# EAGLE board tmod-base (EAGLE 7.7.0)
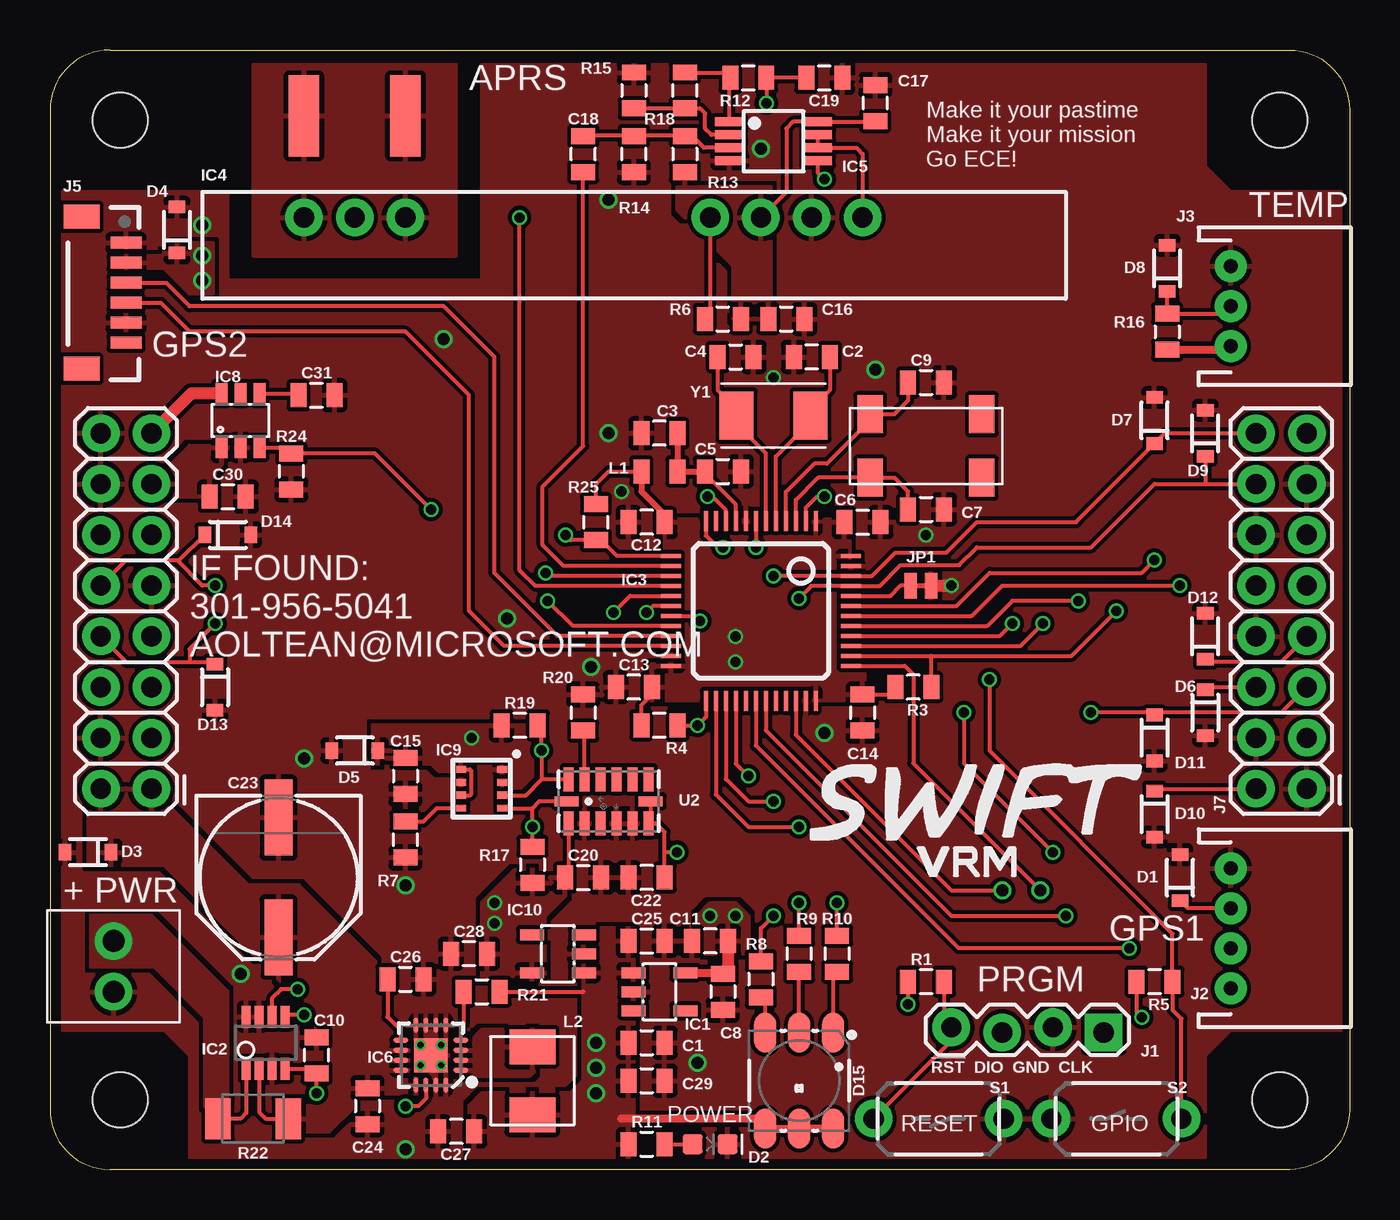
[diagram p0: board, top side]
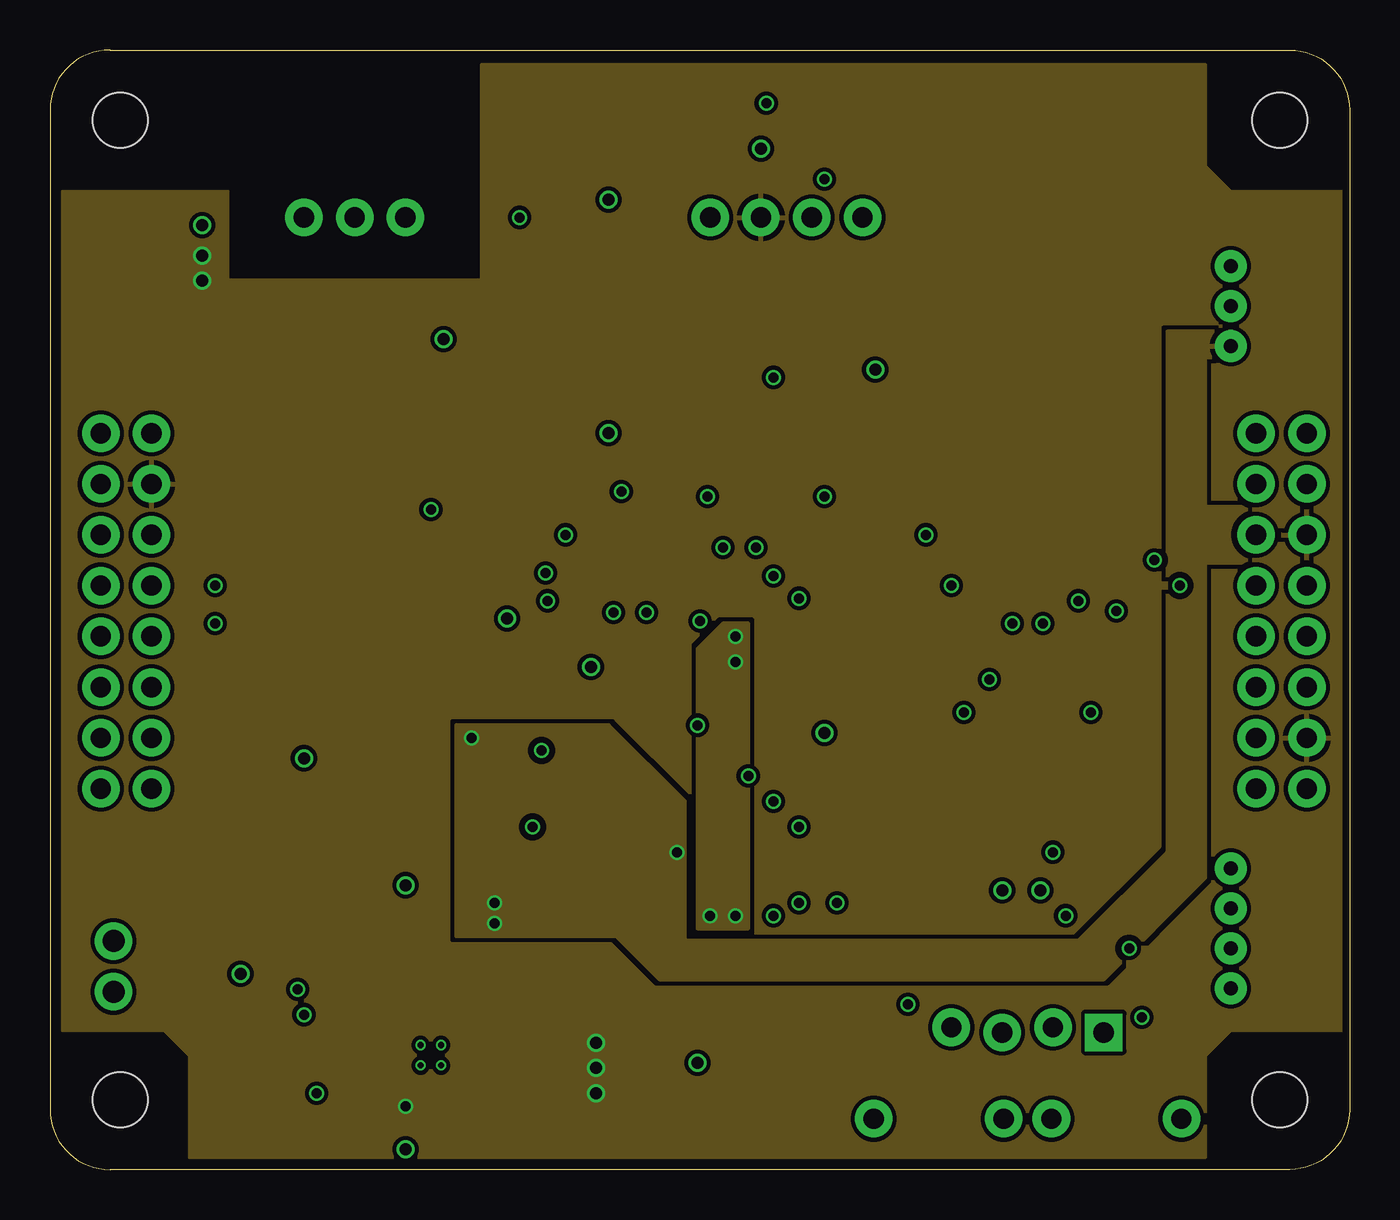
[diagram p1: board, inner layer Power]
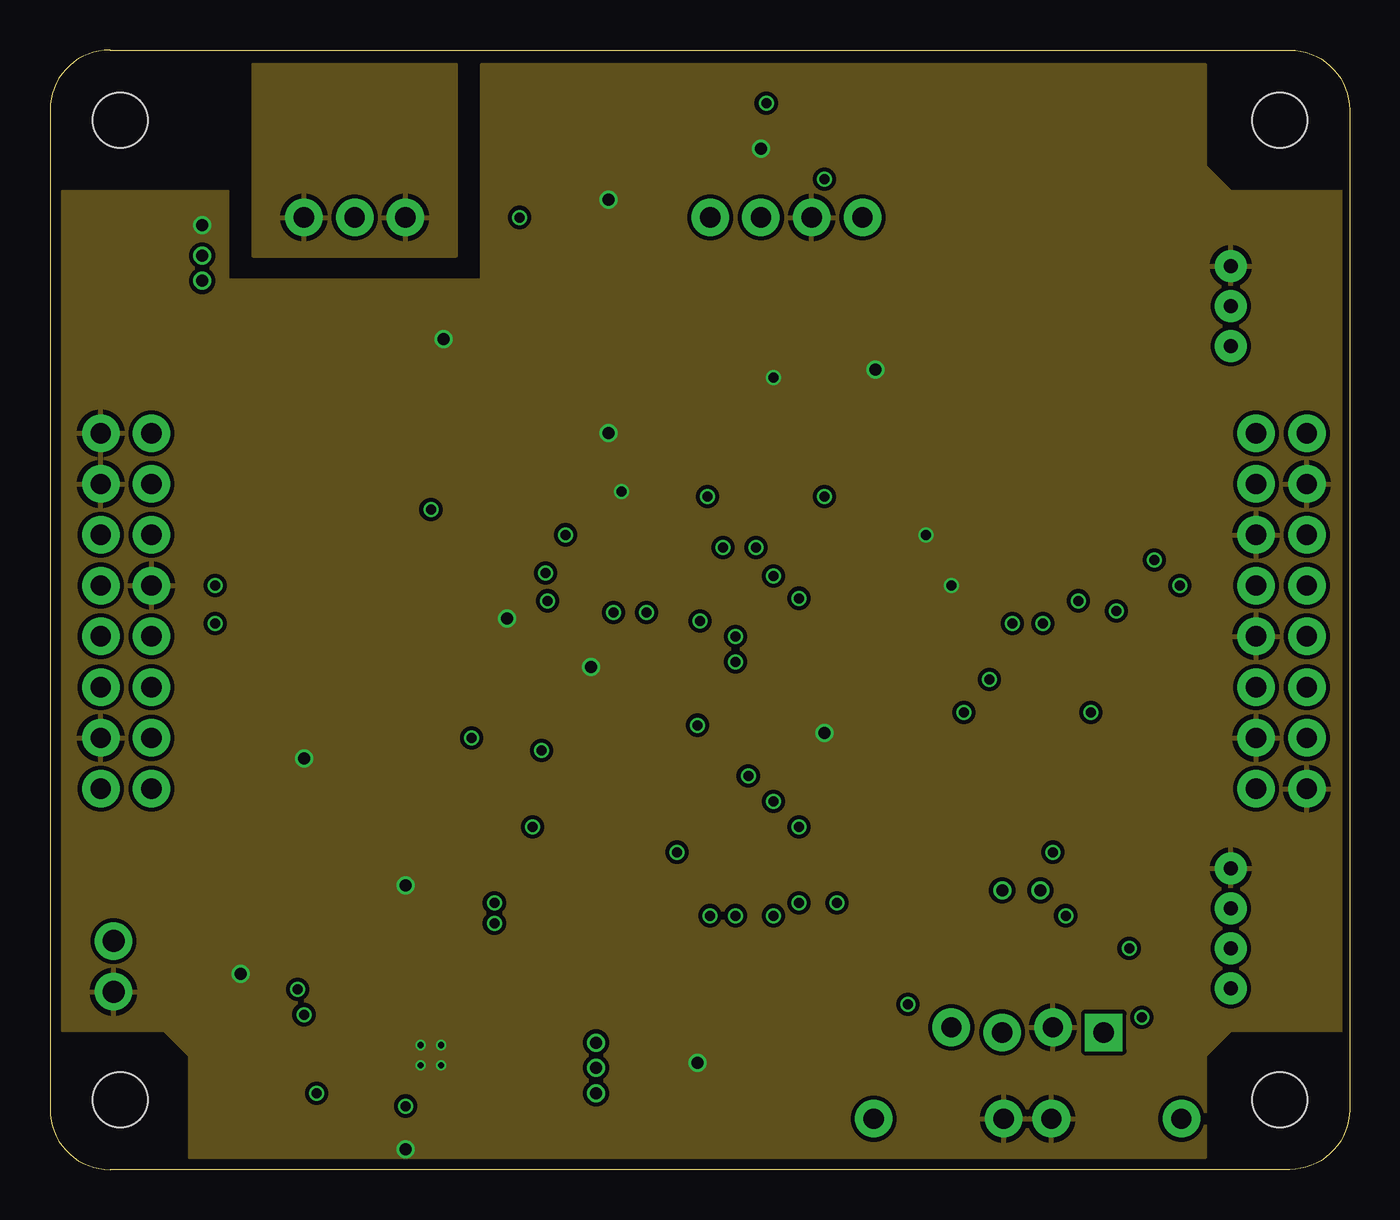
[diagram p2: board, inner layer Ground]
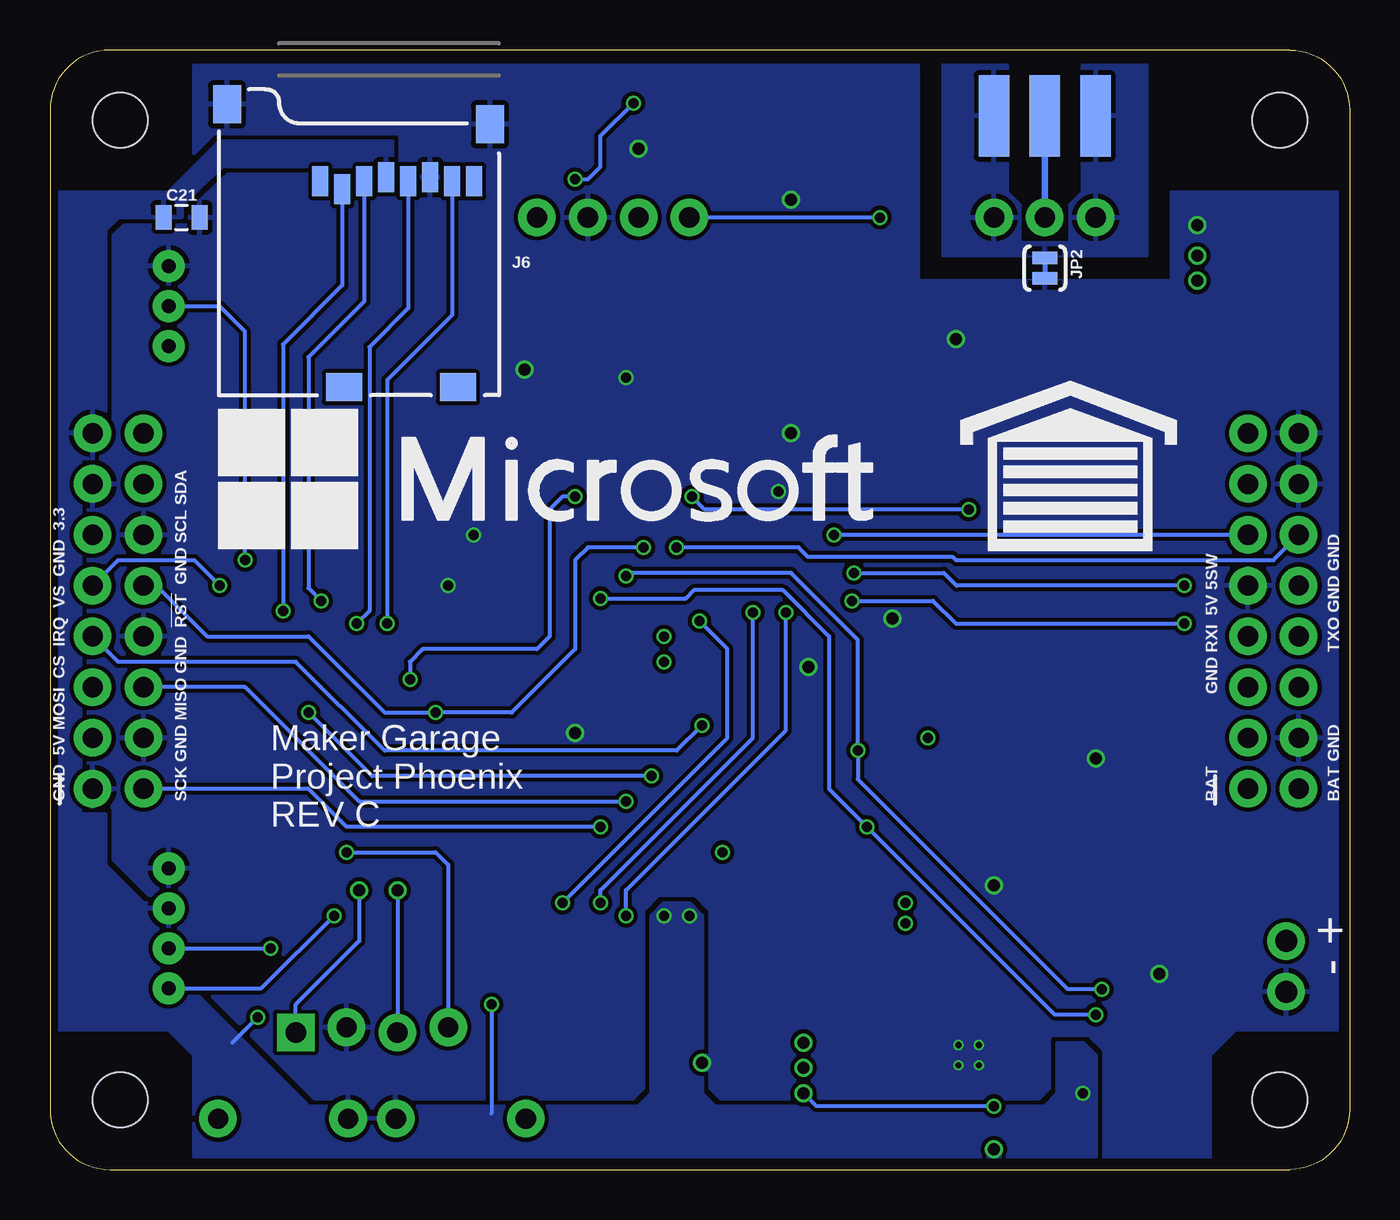
[diagram p3: board, bottom side, seen from below]

Size 65 x 56 mm. Coordinates in mm from the lower left corner, seen from the top.
Outline: 0,53 0,3 arc90 3,0 62,0 arc90 65,3 65,53 arc90 62,56 3,56 arc90 0,53
Copper layers (1*2*15*16): Top 0.035559375mm / dielectric 0.17018125mm / Power 0.01778125mm / dielectric 47mil / Ground 0.01778125mm / dielectric 0.17018125mm / Bottom 0.035559375mm
Design rules "oshpark-4layer *": minimum track width 5mil, minimum drill 10mil, track to track 5mil, track to pad 5mil, pad to pad 5mil, via to via 5mil, smd to smd 5mil, copper to edge 15mil, drill to drill 6mil, minimum pad ring 4mil, minimum via ring 4mil, stop-mask expansion 2.5mil, vias tented up to drill 0mil, thermal gap 10mil
Holes 2.75 mm at 3.5,52.5 61.5,3.5 3.5,3.5 61.5,52.5
tKeepout: area 0.5,49.5 to 6.5,55.5; area 0.5,0.5 to 6.5,6.5; area 58.5,0.5 to 64.5,6.5; area 58.5,49.5 to 64.5,55.5

## Footprints (pad centres in the part's own frame; a part is rotated, then mirrored left to right if it is on the bottom)
0805 = smd 0.8 x 1.2: 1 -0.9,0; 2 0.9,0
PANASONIC_E = smd 3.8 x 1.4: + 3,0; - -3,0
SOD-323 = smd 0.63 x 0.83: A 1.15,0; C -1.15,0
LED-0603 = smd 1 x 1: A -0.877,0; C 0.877,0
LED-TRICOLOR-5050 = smd 2 x 1.1: 1 -2.4,1.7; 2 -2.4,0; 3 -2.4,-1.7; 4 2.4,-1.7; 5 2.4,0; 6 2.4,1.7
SOT23-DBV = smd 0.55 x 1.2: 1 -0.95,-1.3; 2 0,-1.3; 3 0.95,-1.3; 4 0.95,1.3; 5 -0.95,1.3
SOT23-8 = smd 0.45 x 1.1: 1 -0.975,-1.3; 2 -0.325,-1.3; 3 0.325,-1.3; 4 0.975,-1.3; 5 0.975,1.3; 6 0.325,1.3; 7 -0.325,1.3; 8 -0.975,1.3
TQFP48 = smd 0.2 x 1: 1 -2.75,-4.5; 2 -2.25,-4.5; 3 -1.75,-4.5; 4 -1.25,-4.5; 5 -0.75,-4.5; 6 -0.25,-4.5; 7 0.25,-4.5; 8 0.75,-4.5; 9 1.25,-4.5; 10 1.75,-4.5; 11 2.25,-4.5; 12 2.75,-4.5; 25 2.75,4.5; 26 2.25,4.5; 27 1.75,4.5; 28 1.25,4.5; 29 0.75,4.5; 30 0.25,4.5; 31 -0.25,4.5; 32 -0.75,4.5; 33 -1.25,4.5; 34 -1.75,4.5; 35 -2.25,4.5; 36 -2.75,4.5 | smd 1 x 0.2: 13 4.5,-2.75; 14 4.5,-2.25; 15 4.5,-1.75; 16 4.5,-1.25; 17 4.5,-0.75; 18 4.5,-0.25; 19 4.5,0.25; 20 4.5,0.75; 21 4.5,1.25; 22 4.5,1.75; 23 4.5,2.25; 24 4.5,2.75; 37 -4.5,2.75; 38 -4.5,2.25; 39 -4.5,1.75; 40 -4.5,1.25; 41 -4.5,0.75; 42 -4.5,0.25; 43 -4.5,-0.25; 44 -4.5,-0.75; 45 -4.5,-1.25; 46 -4.5,-1.75; 47 -4.5,-2.25; 48 -4.5,-2.75
HX1 = drill 1.016 pad 1.88: 1 0,0; 2 2.54,0; 3 5.08,0; 4 20.32,0; 5 22.86,0; 6 25.4,0; 7 27.94,0
VSSOP8 = smd 1.45 x 0.45: 1 -2.2,0.975; 2 -2.2,0.325; 3 -2.2,-0.325; 4 -2.2,-0.975; 5 2.2,-0.975; 6 2.2,-0.325; 7 2.2,0.325; 8 2.2,0.975
QFN16-3X3MM = smd 0.75 x 0.25: 1 -1.5,0.75; 2 -1.5,0.25; 3 -1.5,-0.25; 4 -1.5,-0.75; 9 1.5,-0.75; 10 1.5,-0.25; 11 1.5,0.25; 12 1.5,0.75 | smd 0.25 x 0.75: 5 -0.75,-1.5; 6 -0.25,-1.5; 7 0.25,-1.5; 8 0.75,-1.5; 13 0.75,1.5; 14 0.25,1.5; 15 -0.25,1.5; 16 -0.75,1.5 | smd 1.68 x 1.68: EXT 0,0
SOT23-6L = smd 0.6 x 1.05: 1 -0.95,-1.35; 2 0,-1.35; 3 0.95,-1.35; 4 0.95,1.35; 5 0,1.35; 6 -0.95,1.35
BME280_LGA = smd 0.5 x 0.35: P$1 1.025,0.975; P$2 1.025,0.325; P$3 1.025,-0.325; P$4 1.025,-0.975; P$5 -1.025,-0.975; P$6 -1.025,-0.325; P$7 -1.025,0.325; P$8 -1.025,0.975
1X04_LOCK@1 = drill 1.016 pad 1.88 square: 1 0,0.127 | drill 1.016 pad 1.88: 2 2.54,-0.127; 3 5.08,0.127; 4 7.62,-0.127
JST-4-PTH = drill 0.7 pad 1.6: 1 -3,0; 2 -1,0; 3 1,0; 4 3,0
JST-3-PTH = drill 0.7 pad 1.6: 1 -2,0; 2 0,0; 3 2,0
1X02_SCREW = drill 1.1 pad 1.88: 1 0,0; 2 2.54,0
1X06-1MM = smd 0.6 x 1.55: 1 -2.54,1.27; 2 -1.54,1.27; 3 -0.54,1.27; 4 0.46,1.27; 5 1.46,1.27; 6 2.46,1.27 | smd 1.2 x 1.8: P$1 -3.84,-0.955; P$2 3.76,-0.955
MICRO-SD-SOCKET = smd 1.8 x 1.4: CD1 -2.05,0.4; CD2 -7.75,0.4 | smd 0.8 x 1.5: CS -7.84,10.3; DI -6.74,10.7; DO -2.34,10.7; GND -3.44,10.9; RSV1 -8.94,10.7; RSV2 -1.24,10.7; SCLK -4.54,10.7; VCC -5.64,10.9 | smd 1.4 x 1.9: GND1 -13.6,14.55; GND3 -0.45,13.55
HAB-EXP = drill 1.016 pad 1.88: A1 17.78,2.54; A2 17.78,0; A3 15.24,2.54; A4 15.24,0; A5 12.7,2.54; A6 12.7,0; A7 10.16,2.54; A8 10.16,0; A9 7.62,2.54; A10 7.62,0; A11 5.08,2.54; A12 5.08,0; A13 2.54,2.54; A14 2.54,0; A15 0,2.54; A16 0,0; B1 17.78,60.325; B2 17.78,57.785; B3 15.24,60.325; B4 15.24,57.785; B5 12.7,60.325; B6 12.7,57.785; B7 10.16,60.325; B8 10.16,57.785; B9 7.62,60.325; B10 7.62,57.785; B11 5.08,60.325; B12 5.08,57.785; B13 2.54,60.325; B14 2.54,57.785; B15 0,60.325; B16 0,57.785
SMA-EDGE = smd 1.524 x 4.064: GND@0 0,0; GND@1 5.08,0; SIG 2.54,0 | smd 1.524 x 4.064 bottom: GND@2 0,0; GND@3 5.08,0
SMT-JUMPER_2_NC_TRACE_NO-SILK = smd 0.635 x 1.27: 1 -0.508,0; 2 0.508,0
PAD-JUMPER-2-NC_BY_TRACE_YES_SILK = smd 0.635 x 1.27: 1 -0.508,0; 2 0.508,0
MPIA4012V2 = smd 2.3 x 1.75: 1 0,1.7; 2 0,-1.7
1210 = smd 1.27 x 2.06: 1 -1.755,0; 2 1.755,0
TACTILE-PTH-THIN = drill 1.016 pad 1.88: 1 -3.251,0; 2 3.251,0
LGA14 = smd 0.5 x 1.2: 1 2,1.1; 2 1.2,1.1; 3 0.4,1.1; 4 -0.4,1.1; 5 -1.2,1.1; 6 -2,1.1; 8 -2,-1.1; 9 -1.2,-1.1; 10 -0.4,-1.1; 11 0.4,-1.1; 12 1.2,-1.1; 13 2,-1.1 | smd 1.2 x 0.5: 7 -2.1,0; 14 2.1,0
CRYSTAL-TXC-7A = smd 1.7 x 2.4: P$1 1.85,0; P$2 -1.85,0
ABS25 = smd 1.27 x 1.905: 1 -2.794,-1.587; 2 2.794,-1.587; 3 2.794,1.587; 4 -2.794,1.587

## Placement (x,y rotation side)
C1  0.1u  [0805]  29.84,6.35 0 top
C2  33p  [0805]  38.1,40.64 180 top
C3  1u  [0805]  30.48,36.83 180 top
C4  33p  [0805]  34.29,40.64 0 top
C5  0.1u  [0805]  33.66,34.92 0 top
C6  0.1u  [0805]  40.64,32.38 0 top
C7  10p  [0805]  43.81,33.02 0 top
C8  1u  [0805]  33.66,8.89 270 top
C9  10p  [0805]  43.81,39.37 0 top
C10  0.1u  [0805]  13.34,5.71 90 top
C11  10u  [0805]  33.02,11.43 180 top
C12  0.1u  [0805]  29.84,32.38 180 top
C13  0.1u  [0805]  29.21,24.13 180 top
C14  0.1u  [0805]  40.64,22.86 270 top
C15  0.1u  [0805]  17.78,19.68 270 top
C16  1u  [0805]  36.83,42.55 0 top
C17  0.1u  [0805]  41.27,53.34 90 top
C18  330p  [0805]  26.67,50.8 90 top
C19  100p  [0805]  38.73,54.61 0 top
C20  1.0u  [0805]  26.67,14.61 0 top
C21  1u  [0805]  58.42,47.62 0 bottom
C22  0.1u  [0805]  29.84,14.61 180 top
C23  150u  [PANASONIC_E]  11.43,14.61 270 top
C24  1u  [0805]  15.88,3.17 270 top
C25  0.1u  [0805]  29.84,11.43 0 top
C26  3.3n  [0805]  17.78,9.53 0 top
C27  10u  [0805]  20.32,1.91 180 top
C28  1u  [0805]  20.95,10.79 180 top
C29  10u  [0805]  29.84,4.45 0 top
C30  0.1u  [0805]  8.89,33.66 0 top
C31  1n  [0805]  13.34,38.73 0 top
D1  5.6V  [SOD-323]  56.52,14.61 90 top
D2  POWER  [LED-0603]  33.02,1.27 0 top
D3  15V  [SOD-323]  1.91,15.88 180 top
D4  5.6V  [SOD-323]  6.35,46.99 90 top
D5  5.6V  [SOD-323]  15.24,20.95 180 top
D6  5.6V  [SOD-323]  57.78,22.86 270 top
D7  5.6V  [SOD-323]  55.24,37.47 90 top
D8  5.6V  [SOD-323]  55.88,45.09 90 top
D9  5.6V  [SOD-323]  57.78,36.83 90 top
D10  5.6V  [SOD-323]  55.24,17.78 270 top
D11  5.6V  [SOD-323]  55.24,21.59 270 top
D12  5.6V  [SOD-323]  57.78,26.67 90 top
D13  5.6V  [SOD-323]  8.26,24.13 270 top
D14  5.6V  [SOD-323]  8.89,31.75 0 top
D15  LED-RGB  [LED-TRICOLOR-5050]  37.47,4.45 270 top
FRAME1  FRAME-LETTERNO_PACKAGE  [DUMMY]  0,57.15 0 top
FRAME2  FRAME-LETTERNO_PACKAGE  [DUMMY]  1.27,57.15 0 top
IC1  TPS70933  [SOT23-DBV]  30.48,8.89 270 top
IC2  INA219SOT  [SOT23-8]  10.79,6.35 0 top
IC3  STM32L443CCT6  [TQFP48]  35.56,27.94 180 top
IC4  HX1  [HX1]  12.7,47.62 0 top
IC5  LMP7702  [VSSOP8]  36.2,51.44 0 top
IC6  TPS62143  [QFN16-3X3MM]  19.05,5.71 180 top
IC8  TPS22918  [SOT23-6L]  9.53,37.47 0 top
IC9  BME280  [BME280_LGA]  21.59,19.05 0 top
IC10  TPS70933  [SOT23-DBV]  25.4,10.79 90 top
J1  DNP  [1X04_LOCK@1]  52.7,6.99 180 top
J2  GPS1  [JST-4-PTH]  59.05,12.06 270 top
J3  TEMP  [JST-3-PTH]  59.05,43.18 270 top
J4  POWER  [1X02_SCREW]  3.17,11.43 270 top
J5  GPS2  [1X06-1MM]  2.54,43.81 270 top
J6  MICRO-SD_CARD_SOCKET  [MICRO-SD-SOCKET]  42.55,38.73 0 bottom
J7  HAB-EXP  [HAB-EXP]  2.54,36.83 270 top
J$1  SMA_EDGE  [SMA-EDGE]  17.78,52.7 0 bottom
JP1  [SMT-JUMPER_2_NC_TRACE_NO-SILK]  43.56,29.21 0 top
JP2  GND  [PAD-JUMPER-2-NC_BY_TRACE_YES_SILK]  15.24,45.09 270 bottom
L1  FERRITE  [0805]  30.48,34.92 0 top
L2  2.2u  [MPIA4012V2]  24.13,4.45 0 top
R1  10K  [0805]  43.81,9.4 180 top
R3  10K  [0805]  43.18,24.13 180 top
R4  10K  [0805]  30.48,22.23 180 top
R5  10K  [0805]  55.24,9.4 180 top
R6  4.7K  [0805]  33.66,42.55 0 top
R7  10K  [0805]  17.78,16.51 90 top
R8  470  [0805]  35.56,9.53 270 top
R9  470  [0805]  37.47,10.79 270 top
R10  560  [0805]  39.37,10.79 270 top
R11  3.3K  [0805]  29.84,1.27 0 top
R12  330K  [0805]  34.92,54.61 0 top
R13  820K  [0805]  31.75,50.8 270 top
R14  220K  [0805]  29.21,50.8 90 top
R15  430K  [0805]  29.21,53.98 270 top
R16  4.7K  [0805]  55.88,41.91 270 top
R17  3.3K  [0805]  24.13,15.24 270 top
R18  680K  [0805]  31.75,53.98 90 top
R19  3.3K  [0805]  23.5,22.23 180 top
R20  10K  [0805]  26.67,22.86 270 top
R21  100K  [0805]  21.59,8.89 0 top
R22  0.01  [1210]  10.16,2.54 180 top
R24  10K  [0805]  12.06,34.92 270 top
R25  10K  [0805]  27.3,32.38 90 top
S1  RST  [TACTILE-PTH-THIN]  44.45,2.54 180 top
S2  BTN  [TACTILE-PTH-THIN]  53.34,2.54 0 top
U2  ADXL345  [LGA14]  27.94,18.41 180 top
U$1  [MSFT_LOGO]  37.47,34.29 0 bottom
U$2  [GARAGE]  13.97,34.29 0 bottom
U$3  [SWIFT]  45.09,17.14 0 top
Y1  8M  [CRYSTAL-TXC-7A]  36.2,37.72 0 top
Y2  32768  [ABS25]  43.81,36.2 0 top

## Library data of the parts
C1-C31 JP2 R1 R3-R21 R24 R25 = SparkFun-Passives
D1 D3-D14 = SparkFun-DiscreteSemi; PROD_ID: DIO-12442
D2 = SparkFun-LED; PROD_ID: DIO-00821
D15 IC2 IC4-IC6 IC8 J4 J7 L1 L2 S1 S2 U$1-U$3 Y2 = HAB
FRAME1 FRAME2 = SparkFun-Aesthetics; DESIGNER: Nobody; VERSION: v01
IC1 IC10 = texas; MF: TEXAS INSTRUMENTS; MPN: TPS77033DBVT; OC_FARNELL: 8461570; OC_NEWARK: 77C1187
IC3 = stm32xx
IC9 = BME280ComponentLibrary; PROD_ID: IC-13090
J1 = SparkFun-Connectors; PROD_ID: CONN-09696
J2 = SparkFun-Connectors; PROD_ID: WIRE-13531; SF_ID: PRT-09916
J3 = SparkFun-Connectors; PROD_ID: WIRE-10037; SF_ID: PRT-09915
J5 J$1 = SparkFun-Connectors
J6 = SparkFun-Connectors; PROD_ID: CONN-07820; SF_ID: PRT-00127
JP1 = SparkFun-Jumpers
R22 = SparkFun-Resistors; PROD_ID: RES-12374
U2 = SparkFun-Sensors
Y1 = SparkFun-FreqCtrl

## Nets
3.3V: C6.1 C8.1 C10.1 C11.1 C12.1 C13.1 C14.1 C21.1 D1.C IC1.5 IC2.4 IC3.1 IC3.24 IC3.36 IC3.48 J2.2 J6.VCC J7.B15 L1.1 R1.2 R3.2 R4.2 R5.2 R25.2
5V: C1.1 C16.1 C17.1 C25.1 C27.1 C29.1 C30.1 D4.C D15.4 D15.5 D15.6 IC1.1 IC4.5 IC5.8 IC6.14 IC8.1 IC10.1 J5.2 J7.A13 J7.B3 L2.2 R6.2 R11.1 R13.2 R21.2
5V_PI: IC8.6 J7.A15
!RST!: IC3.7 J1.4 J7.B10 R1.1 S1.2
A+: C18.2 IC5.3 R13.1 R14.2
A-: IC5.2 R15.2 R18.1
ADXL_SDO: R20.2 U2.12
BC: D15.1 R10.2
BME_SDO: IC9.P$5 R7.2
BOOT0: IC3.44 JP1.1
BTN: IC3.2 R5.1 S2.2
CT: C31.1 IC8.4
DAC: C18.1 IC3.14
GC: D15.2 R9.2
GND: C1.2 C2.2 C3.2 C4.2 C5.2 C6.2 C7.2 C8.2 C9.2 C10.2 C11.2 C12.2 C13.2 C14.2 C15.2 C16.2 C17.2 C19.2 C20.2 C21.2 C22.2 C23.- C24.2 C25.2 C26.2 C27.2 C28.2 C29.2 C30.2 C31.2 D1.A D2.C D3.A D4.A D5.A D6.A D7.A D8.A D9.A D10.A D11.A D12.A D13.A D14.A IC1.2 IC2.3 IC2.7 IC2.8 IC3.8 IC3.23 IC3.35 IC3.47 IC4.6 IC5.4 IC6.5 IC6.6 IC6.7 IC6.8 IC6.15 IC6.16 IC6.EXT IC8.2 IC9.P$1 IC9.P$7 IC10.2 J1.2 J2.1 J3.1 J4.2 J5.1 J5.5 J6.GND J6.GND1 J6.GND3 J7.A4 J7.A9 J7.A14 J7.A16 J7.B1 J7.B4 J7.B8 J7.B12 J7.B13 JP1.2 JP2.2 R7.1 R14.1 R15.1 R20.1 R24.2 S1.1 S2.1 U2.2 U2.4 U2.5
GPSRX1: IC3.31 J2.4
GPSRX2: IC3.22 J5.4
GPSTX1: IC3.30 J2.3
GPSTX2: IC3.21 J5.3
HXEN: IC3.16 IC4.4 R6.1
INT: U2.8
INT2: U2.9
K_PI: IC3.10 IC8.3 R24.1
LCS: D12.C IC3.25 J7.B7 R4.1
LEDB: IC3.19 R10.1
LEDG: IC3.18 R9.1
LEDR: IC3.17 R8.1
LP1: IC5.1 R12.1 R18.2
LP2: C19.1 IC5.5 R12.2
MISO1: IC3.40 J6.DO
MISO2: D6.C IC3.27 J7.B6
MOSI1: IC3.41 J6.DI
MOSI2: D11.C IC3.28 J7.B5
OSC32_IN: C7.1 IC3.3 Y2.1
OSC32_OUT: C9.1 IC3.4 Y2.4
OSC_IN: C2.1 IC3.5 Y1.P$1
OSC_OUT: C4.1 IC3.6 Y1.P$2
PG5: IC6.4 R21.1
PLED: D2.A R11.2
R_RX: IC3.13 J7.A11 R25.1
R_TX: IC3.12 J7.A12
RC: D15.3 R8.2
RF_HX1: IC4.2 J$1.SIG
RGND: IC4.1 IC4.3 J$1.GND@0 J$1.GND@1 J$1.GND@2 J$1.GND@3 JP2.1
RSV5: D13.C IC3.20 J7.A8
RSV6: D14.C IC3.15 J7.A10
RSV7: IC3.42 J7.B9
SCK1: IC3.39 J6.SCLK
SCK2: D10.C IC3.26 J7.B2
SCL: D9.C IC2.5 IC3.45 IC9.P$4 J7.B14 R17.1 U2.14
SDA: D7.C IC2.6 IC3.46 IC9.P$3 J7.B16 R19.1 U2.13
SDCS: IC3.38 J6.CS R3.1
SS5: C26.1 IC6.9
SW5: IC6.1 IC6.2 IC6.3 L2.1
SWCLK: IC3.37 J1.1
SWDIO: IC3.34 J1.3
TEMP: D8.C IC3.43 J3.2 R16.1
TXD: IC4.7 IC5.6 IC5.7
VBAT: C23.+ C24.1 D3.C IC2.2 IC6.10 IC6.11 IC6.12 IC6.13 J7.A1 J7.A2 R22.1
VDDA: C3.1 C5.1 IC3.9 L1.2
VIN: IC2.1 J4.1 R22.2
VS: C15.1 C20.1 C22.1 C28.1 D5.C IC9.P$2 IC9.P$6 IC9.P$8 IC10.5 J3.3 J7.B11 R16.2 R17.2 R19.2 U2.1 U2.6 U2.7

## Tracks (layer width: path | path; a pad name or v marks a point on that pad's centre or on a via)
3.3V  (via drill 0.5)
  Top 0.203: C14.1 41.91,23.76 R3.2 | R4.2 29.58,23.23 30.11,23.76 C13.1 | R1.2 v42.91,8.26 | R25.2 27.3,34.29 27.94,34.92 L1.1 | R5.2 54.34,7.88 v54.61,7.62 | J2.2 56.91,13.06 D1.C | v13.34,3.81 C10.1 13.1,5.05 IC2.4
  Top 0.305: L1.1 29.58,33.92 30.75,32.76 C12.1
  Top 0.406: IC1.5 33.6,9.84 C8.1
  Top 0.61: C11.1 33.92,10.05 C8.1
  Bottom 0.203: v54.61,7.62 55.88,6.35 | v42.91,8.26 42.91,2.81
  other vias: 34.29,12.7 33.02,12.7 34.29,25.4 34.29,26.67
  pour Top (isolate 0.203, rank 2): 30.73,32.51 30.73,31.11 31.11,31.11 31.11,25.27 30.1,25.27 29.97,25.15 29.97,23.5 40.77,23.5 40.77,24.77 40.01,24.77 40.01,32.51 38.73,32.51 38.73,32.38 32.38,32.38 32.38,32.51
  pour Bottom (isolate 0.203, rank 2): 64.77,48.9 59.05,48.9 56.52,51.44 47.88,51.44 47.88,50.16 56.39,50.16 58.42,48.26 58.42,47.62 61.59,47.62 62.23,46.99 62.23,35.56 63.5,35.56 63.5,17.78 62.23,17.78 62.23,15.24 60.33,13.34 58.42,13.34 58.42,9.53 52.07,3.17 35.56,3.17 34.92,3.81 34.92,12.7 34.29,13.34 33.02,13.34 32.38,12.7 32.38,3.81 31.75,3.17 15.24,3.17 14.61,3.81 14.61,6.35 13.34,6.35 12.7,5.71 12.7,0.64 57.78,0.64 57.78,5.71 59.05,6.99 64.77,6.99
  pour Top (isolate 0.203, rank 2): 33.02,13.34 34.29,13.34 34.92,12.7 34.92,10.79 32.38,10.79 32.38,12.7
  pour Power (isolate 0.203, rank 3): 32.38,26.04 32.38,12.06 34.92,12.06 34.92,27.3 33.66,27.3
5V  (via drill 0.5, 0.6)
  Top 0.203: C17.1 41.24,52.41 IC5.8 37.17,52.41 36.83,52.07 36.83,48.9 IC4.5 | R21.2 26.67,8.89 | IC6.14 18.8,3.56 18.41,3.17 v17.78,3.17
  Top 0.406: 28.57,2.54 35.27,2.54 D15.4 D15.5 D15.6
  Bottom 0.203: v17.78,3.17 26.67,3.17 v27.3,3.81
  other vias: 27.3,5.08 27.3,6.35 7.62,45.72 7.62,44.45
  pour Top (isolate 0.203, rank 3): 21.59,3.81 20.95,3.17 20.95,0.64 29.21,0.64 29.21,12.06 26.67,12.06 26.67,4.45 26.04,3.81
  pour Top (isolate 0.203, rank 2): 31.37,49.91 31.37,48.01 34.16,45.21 34.16,42.55 36.07,42.55 36.07,49.15 32.51,49.15 31.75,49.91
  pour Top (isolate 0.203, rank 2): 4.45,34.92 4.45,33.66 8.26,33.66 8.26,34.92 8.89,35.56 8.89,36.2 6.99,36.2 5.71,34.92
  pour Power (isolate 0.203, rank 4): 0.64,48.9 0.64,6.99 5.71,6.99 6.99,5.71 6.99,0.64 57.78,0.64 57.78,5.71 59.05,6.99 64.77,6.99 64.77,48.9 59.05,48.9 57.78,50.16 57.78,55.24 21.59,55.24 21.59,44.45 8.89,44.45 8.89,48.9
  pour Top (isolate 0.203, rank 2): 8.13,46.35 8.13,43.81 6.99,43.81 5.71,45.09 3.81,45.09 3.81,45.72 5.71,45.72 5.71,46.35
5V_PI
  Top 0.61: IC8.6 7.07,38.81 J7.A15
!RST!  (via drill 0.5)
  Top 0.203: R1.1 44.72,7.48 J1.4 45.09,6.43 S1.2 | IC3.7 v35.31,31.11 | v45.72,22.86 45.72,20.32 v50.16,15.88
  Bottom 0.203: v35.31,31.11 38.1,31.11 38.73,30.48 38.73,26.04 41.91,22.86 v45.72,22.86 48.26,22.86 52.07,26.67 57.15,26.67 59.69,29.21 J7.B10 | v50.16,15.88 45.72,15.88 45.09,15.24 J1.4
A+
  Top 0.203: IC5.3 32.71,51.11 32.12,51.7 R13.1 R14.2 C18.2
A-
  Top 0.203: R15.2 R18.1 | IC5.2 33.08,51.76 32.77,52.07 32.77,52.83 32.52,53.08 R18.1 | R18.1 31.75,53.34
ADXL_SDO
  Top 0.203: U2.12 26.74,21.89 R20.2
BC
  Top 0.203: R10.2 39.16,9.69 D15.1
BME_SDO
  Top 0.203: IC9.P$5 19.34,18.07 18.68,17.41 R7.2
BOOT0
  Top 0.203: IC3.44 42.02,28.69 42.55,29.21 JP1.1
BTN  (via drill 0.5)
  Top 0.203: S2.2 56.59,7.54 56.15,7.99 R5.1 56.15,11.8 46.99,20.95 v46.99,24.51 | IC3.2 37.81,33.11 38.35,33.66 v38.73,33.66
  Bottom 0.203: v38.73,33.66 39.37,33.66 40.01,33.02 40.01,26.67 40.64,26.04 46.35,26.04 46.99,25.4 v46.99,24.51
CT
  Top 0.203: IC8.4 12.36,38.81 C31.1
DAC
  Top 0.203: IC3.14 25.69,30.19 24.64,31.24 24.64,34.16 26.67,36.2 C18.1
GC
  Top 0.203: D15.2 R9.2
GND  (via drill 0.3, 0.5, 0.6)
  Top 0.203: v18.54,5.21 IC6.EXT
  Top 0.61: JP1.2 v45.09,29.21
  other vias: 18.54,6.22 19.56,6.22 19.56,5.21 38.73,21.84 43.81,31.75 17.78,14.22 12.7,20.57 36.2,39.62 27.94,36.83 28.57,33.91 41.27,40.01 27.05,25.15 19.68,41.53 27.94,48.51 35.56,51.05 22.86,27.56 32.38,5.33 17.78,1.02 7.62,47.24 9.53,9.78
  pour Top (isolate 0.203, rank 4): 0.64,48.9 0.64,6.99 5.71,6.99 6.99,5.71 6.99,0.64 57.78,0.64 57.78,5.71 59.05,6.99 64.77,6.99 64.77,48.9 59.05,48.9 57.78,50.16 57.78,55.24 21.59,55.24 21.59,44.45 8.89,44.45 8.89,48.9
  pour Bottom (isolate 0.203, rank 4): 0.64,48.9 0.64,6.99 5.71,6.99 6.99,5.71 6.99,0.64 57.78,0.64 57.78,5.71 59.05,6.99 64.77,6.99 64.77,48.9 59.05,48.9 57.78,50.16 57.78,55.24 21.59,55.24 21.59,44.45 8.89,44.45 8.89,48.9
  pour Ground (isolate 0.203, rank 4): 0.64,48.9 0.64,6.99 5.71,6.99 6.99,5.71 6.99,0.64 57.78,0.64 57.78,5.71 59.05,6.99 64.77,6.99 64.77,48.9 59.05,48.9 57.78,50.16 57.78,55.24 21.59,55.24 21.59,44.45 8.89,44.45 8.89,48.9
GPSRX1  (via drill 0.5)
  Top 0.203: IC3.31 35.81,21.98 45.09,12.7 v50.8,12.7
  Bottom 0.203: v50.8,12.7 54.44,9.06 J2.4
GPSRX2
  Top 0.203: J5.4 5.54,43.35 6.99,41.91 17.78,41.91 20.95,38.73 20.95,27.94 22.7,26.19 IC3.22
GPSTX1  (via drill 0.5)
  Top 0.203: IC3.30 35.31,21.2 45.45,11.06 v53.98,11.06
  Bottom 0.203: J2.3 v53.98,11.06
GPSTX2
  Top 0.203: J5.3 5.81,44.35 6.99,43.18 19.68,43.18 22.23,40.64 22.23,29.84 25.38,26.69 IC3.21
HXEN  (via drill 0.5)
  Top 0.203: IC4.4 33.02,42.81 R6.1 | IC3.16 24.28,29.19 23.5,29.97 v23.5,47.62
  Bottom 0.203: v23.5,47.62 IC4.4
K_PI  (via drill 0.5)
  Top 0.203: IC8.3 11.78,36.12 R24.1 16.25,35.83 v19.05,33.02 | IC3.10 33.81,32.99 33.15,33.66 v32.89,33.66
  Bottom 0.203: v19.05,33.02 32.26,33.02 v32.89,33.66
LCS  (via drill 0.5)
  Top 0.203: IC3.25 32.81,22.65 v32.38,22.23 R4.1 | 57.66,25.4 D12.C 57.91,25.4 61.59,25.4 J7.B7
  Bottom 0.203: v32.38,22.23 33.66,20.95 48.26,20.95 52.7,25.4 61.59,25.4 J7.B7
LEDB  (via drill 0.5)
  Top 0.203: R10.1 v39.37,13.34 | IC3.19 32.25,27.69 v32.51,27.43
  Bottom 0.203: v39.37,13.34 31.11,21.59 31.11,26.04 v32.51,27.43
LEDG  (via drill 0.5)
  Top 0.203: IC3.18 30.17,28.19 v29.84,27.86 | R9.1 v37.47,13.34
  Bottom 0.203: v29.84,27.86 29.84,21.59 37.47,13.97 v37.47,13.34
LEDR  (via drill 0.5)
  Top 0.203: R8.1 35.56,12.06 v36.2,12.7 | v28.19,27.86 29.02,28.69 IC3.17
  Bottom 0.203: v36.2,12.7 36.2,13.97 28.19,21.97 v28.19,27.86
LP1
  Top 0.203: R18.2 33.76,54.88 R12.1 33.99,54.58 IC5.1
LP2  (via drill 0.5)
  Top 0.203: C19.1 R12.2 v35.83,53.34 | IC5.5 38.4,49.87 v38.73,49.53
  Bottom 0.203: v38.73,49.53 38.1,49.53 37.47,50.16 37.47,51.7 v35.83,53.34
MISO1  (via drill 0.5)
  Top 0.203: IC3.40 47.52,26.69 v48.13,27.3
  Bottom 0.203: J6.DO 44.88,42.74 48.13,39.5 v48.13,27.3
MISO2  (via drill 0.5)
  Top 0.203: IC3.27 33.81,19.53 34.92,18.41 v36.2,18.41 | D6.C 57.91,24.13 J7.B6
  Bottom 0.203: v36.2,18.41 49.53,18.41 55.24,24.13 J7.B6
MOSI1  (via drill 0.5)
  Top 0.203: IC3.41 46.88,27.19 48.13,28.45 v51.44,28.45
  Bottom 0.203: J6.DI 49.28,43.42 52.07,40.64 52.07,29.08 v51.44,28.45
MOSI2  (via drill 0.5)
  Top 0.203: IC3.28 34.31,20.3 v34.92,19.68 | v52.07,22.86 55.12,22.86 D11.C 55.37,22.86 61.59,22.86 J7.B5
  Bottom 0.203: v34.92,19.68 48.9,19.68 v52.07,22.86
OSC32_IN
  Top 0.203: C7.1 42.91,33.92 42.23,34.61 Y2.1 38.42,34.61 37.31,33.5 IC3.3
OSC32_OUT
  Top 0.203: C9.1 42.91,38.47 42.23,37.78 Y2.4 41.02,37.47 38.86,35.31 38.23,35.31 36.81,33.89 IC3.4
OSC_IN
  Top 0.203: C2.1 39,39 38.05,38.05 Y1.P$1 38.05,37.41 36.31,35.67 IC3.5
OSC_OUT
  Top 0.203: C4.1 33.39,39 34.34,38.05 Y1.P$2 34.34,37.28 35.81,35.82 IC3.6
PG5
  Top 0.203: IC6.4 20.55,7.21 20.69,7.36 R21.1
PLED
  Top 0.203: R11.2 D2.A
R_RX  (via drill 0.5)
  Top 0.203: IC3.13 28.36,30.69 27.57,31.48 R25.1 26.05,31.48 v25.78,31.75
  Bottom 0.203: J7.A11 v25.78,31.75
R_TX  (via drill 0.5)
  Top 0.203: IC3.12 32.81,31.71 33.4,31.11 v33.66,31.11
  Bottom 0.203: v33.66,31.11 27.56,31.11 27.1,30.66 19.86,30.66 19.68,30.48 3.81,30.48 J7.A12
RC
  Top 0.203: R8.2 35.77,8.42 D15.3
RF_HX1
  Bottom 0.32: J$1.SIG IC4.2
RGND
  pour Top (isolate 0.203, rank 3): 10.16,55.24 10.16,45.72 20.32,45.72 20.32,55.24
  pour Bottom (isolate 0.203, rank 3): 10.16,55.24 10.16,45.72 20.32,45.72 20.32,55.24 17.14,55.24 17.14,48.9 16.51,48.26 16.51,46.35 13.97,46.35 13.97,48.26 13.34,48.9 13.34,55.24
  pour Ground (isolate 0.203, rank 3): 10.16,55.24 10.16,45.72 20.32,45.72 20.32,55.24
RSV5  (via drill 0.5)
  Top 0.203: J7.A8 3.81,25.4 6.99,25.4 | IC3.20 26.15,27.19 v24.89,28.45 | 6.99,25.4 8.13,25.4 D13.C | v8.26,27.3 6.99,26.04 6.99,25.4
  Bottom 0.203: v8.26,27.3 19.68,27.3 20.83,28.45 v24.89,28.45
RSV6  (via drill 0.5)
  Top 0.203: J7.A10 3.81,30.48 6.35,30.48 | 6.35,30.48 6.47,30.48 D14.C | IC3.15 24.95,29.69 v24.79,29.84 | v8.26,29.21 7.62,29.21 6.35,30.48
  Bottom 0.203: v8.26,29.21 19.66,29.21 20.3,29.84 v24.79,29.84
RSV7  (via drill 0.5)
  Top 0.203: IC3.42 46.1,27.69 47.62,29.21 v56.52,29.21
  Bottom 0.203: J7.B9 61.59,30.48 57.78,30.48 v56.52,29.21
SCK1  (via drill 0.5)
  Top 0.203: IC3.39 48.54,26.19 v49.66,27.3
  Bottom 0.203: J6.SCLK 47.09,43.09 49.02,41.15 49.02,27.94 v49.66,27.3
SCK2  (via drill 0.5)
  Top 0.203: IC3.26 33.31,18.76 34.92,17.14 v37.47,17.14 | 55.37,19.05 D10.C 55.12,19.05 J7.B2
  Bottom 0.203: v37.47,17.14 50.16,17.14 52.07,19.05 J7.B2
SCL  (via drill 0.5)
  Top 0.203: IC9.P$4 24.13,18.07 | D9.C 57.78,34.29 | U2.14 24.47,18.41 24.13,18.07 | 24.13,18.07 v24.13,17.14 R17.1 | v37.47,28.57 38.08,29.19 IC3.45 41.51,29.19 42.55,30.23 45.47,30.23 46.35,31.11 52.07,31.11 55.24,34.29 57.78,34.29 | 57.78,34.29 J7.B14 | v12.7,7.75 11.87,7.75 IC2.5
  Bottom 0.203: v37.47,28.57 33.2,28.57 32.79,28.98 28.35,28.98 26.04,26.67 26.04,19.05 v24.13,17.14 14.73,7.75 v12.7,7.75
SDA  (via drill 0.5)
  Top 0.203: IC9.P$3 23.8,18.73 24.59,19.52 | U2.13 24.59,19.52 | v36.2,29.69 IC3.46 41.12,29.69 42.29,30.86 44.83,30.86 46.35,32.38 51.31,32.38 D7.C 55.76,36.83 J7.B16 | 24.59,19.52 v24.59,20.95 24.59,22.02 R19.1 | IC2.6 11.12,8.58 11.56,9.02 v12.39,9.02
  Bottom 0.203: v36.2,29.69 36.04,29.84 27.94,29.84 24.59,26.5 v24.59,20.95 24.59,19.52 14.1,9.02 v12.39,9.02
SDCS  (via drill 0.5)
  Top 0.203: IC3.38 44.08,25.69 | 44.08,25.69 51.09,25.69 v53.34,27.94 | R3.1 44.08,25.69
  Bottom 0.203: J6.CS 50.38,44.23 53.34,41.27 v53.34,27.94
SS5
  Top 0.203: IC6.9 17.55,6.96 16.88,7.63 C26.1
SW5
  pour Top (isolate 0.203, rank 3): 20.32,6.35 20.32,5.08 20.7,4.7 24,4.7 24.51,5.21 24.51,6.99 21.59,6.99 20.95,6.35
SWCLK  (via drill 0.6)
  Top 0.203: IC3.37 42.76,25.19 43.18,24.77 43.18,20.32 v49.53,13.97
  Bottom 0.203: v49.53,13.97 49.53,11.43 52.7,8.26 J1.1
SWDIO  (via drill 0.6)
  Top 0.203: IC3.34 37.31,21.75 45.09,13.97 v47.62,13.97
  Bottom 0.203: v47.62,13.97 J1.3
TEMP  (via drill 0.5)
  Top 0.203: J3.2 58.69,42.81 R16.1 D8.C | v55.24,30.48 54.61,29.84 46.99,29.84 45.34,28.19 IC3.43
  Bottom 0.203: v55.24,30.48 55.24,41.91 56.52,43.18 J3.2
TXD
  Top 0.203: IC5.7 IC5.6 40.33,51.11 40.64,50.8 IC4.7
VBAT
  Top 0.203: IC2.2 10.47,2.87 10.79,2.54 R22.1
  pour Top (isolate 0.203, rank 3): 1.91,19.68 1.91,15.24 5.71,15.24 13.97,6.99 13.97,3.81 13.34,3.17 11.43,3.17 11.43,1.91 13.97,1.91 15.24,3.17 15.24,3.81 18.41,3.81 18.41,6.35 17.78,6.35 16.51,7.62 16.51,10.16 12.45,14.22 9.91,14.22 5.71,18.41 5.71,19.68
VDDA
  Top 0.203: IC3.9 34.31,33.25 32.76,34.81 C5.1
  Top 0.305: C3.1 L1.2 C5.1
VIN
  Top 0.203: IC2.1 9.82,2.83 9.53,2.54 R22.2
  pour Top (isolate 0.203, rank 3, no thermals): 2.03,12.7 2.03,10.16 5.21,10.16 7.75,7.62 7.75,3.17 8.89,3.17 8.89,8.89 5.08,12.7
VS  (via drill 0.5)
  Top 0.203: U2.1 25.94,14.78 C20.1 | C22.1 30.75,15.88 | 30.75,15.88 30.75,16.88 30.31,17.32 U2.6 30.04,17.41 U2.7 | IC9.P$6 21.01,18.73 21.08,18.8 21.08,19.94 21,20.02 IC9.P$8 | v31.37,15.88 30.75,15.88
  Top 0.406: R16.2 58.88,41.01 J3.3
  other vias: 22.23,12.32 22.23,13.34 21.08,21.59
  pour Top (isolate 0.203, rank 2): 16.13,22.23 16.13,20.32 19.05,20.32 19.43,19.94 20.57,19.94 20.57,20.57 23.24,20.57 23.24,19.43 22.61,19.43 22.61,19.05 23.5,19.05 24.13,19.68 24.13,22.23
  pour Top (isolate 0.203, rank 2): 26.04,14.99 23.24,14.99 21.59,13.34 21.59,9.53 24.77,9.53 24.77,12.7 26.04,13.97
  pour Power (isolate 0.305, rank 2): 20.32,11.68 28.32,11.68 30.48,9.53 52.7,9.53 57.78,14.61 57.78,30.35 63.5,30.35 63.5,33.15 57.78,33.15 57.78,40.64 59.69,40.64 59.69,41.91 55.88,41.91 55.88,15.88 51.44,11.43 31.75,11.43 31.75,18.41 27.94,22.23 20.32,22.23

## Text on the board
tPlace: APRS | Make it your pastime / Make it your mission / Go ECE! | IF FOUND: / 301-956-5041 / AOLTEAN@MICROSOFT.COM | + PWR | PRGM | !RST! DIO GND CLK | RESET | GPIO
bPlace: BAT GND TXO GND GND | BAT GND RXI 5V 5SW | SCK GND MISO GND !RST! GND SCL SDA | GND 5V MOSI CS IRQ VS GND 3.3 | Maker Garage / Project Phoenix / REV C | - +